# EAGLE board synth (EAGLE 6.3)
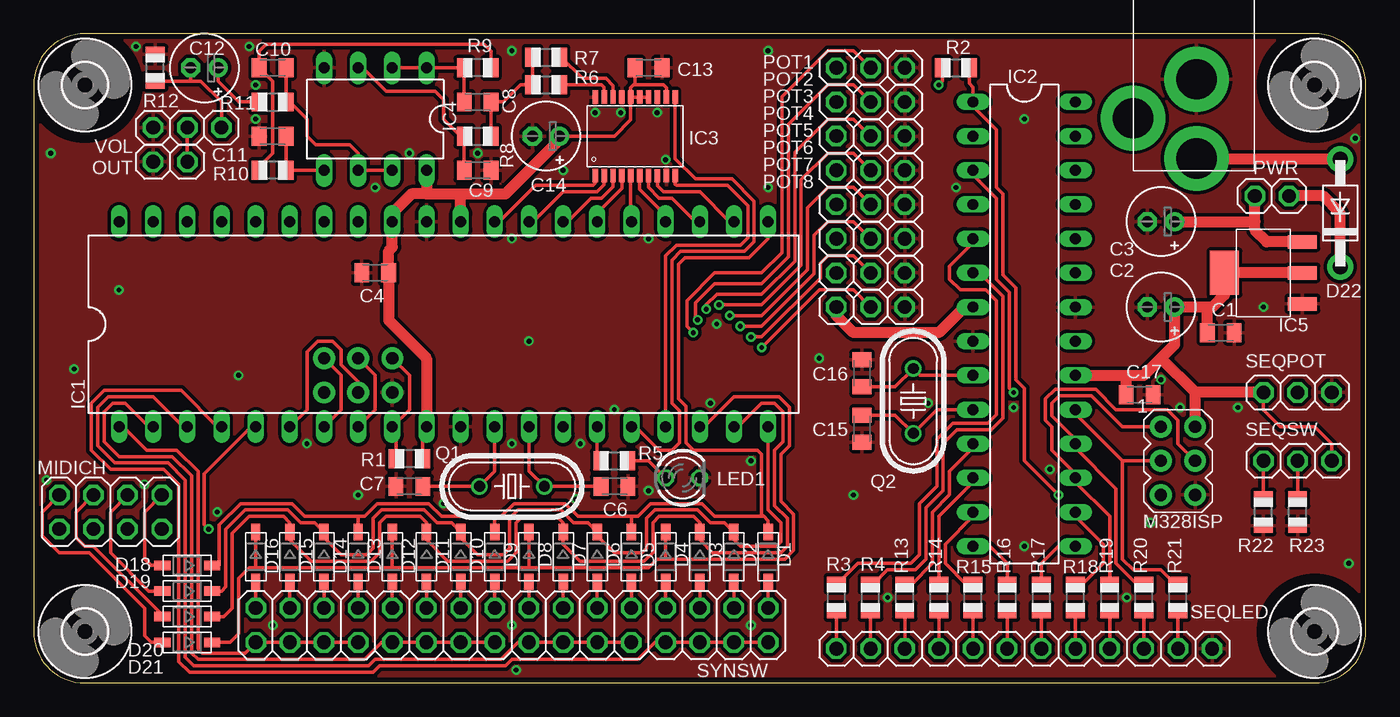
[diagram p0: board, top side]
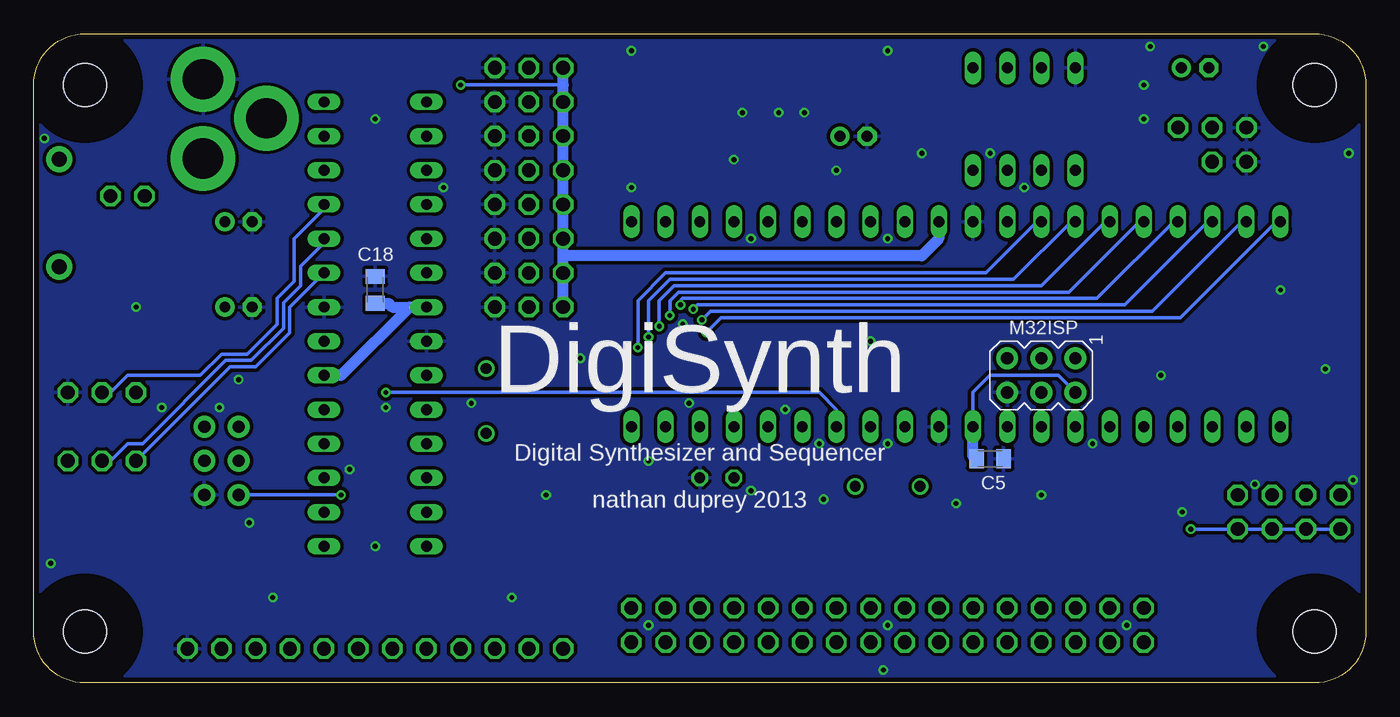
[diagram p1: board, bottom side, seen from below]

Size 99.06 x 48.26 mm. Coordinates in mm from the lower left corner, seen from the top.
Outline: 0,44.45 0,3.81 arc90 3.81,0 95.25,0 arc90 99.06,3.81 99.06,44.45 arc90 95.25,48.26 3.81,48.26 arc90 0,44.45
Copper layers (1*16): Top 0.0356mm / dielectric 1.5011mm / Bottom 0.0356mm
Design rules "LaenPCBOrder *": minimum track width 6mil, minimum drill 13mil, track to track 6mil, track to pad 6mil, pad to pad 6mil, via to via 6mil, smd to smd 6mil, copper to edge 15mil, drill to drill 6mil, minimum pad ring 7mil, minimum via ring 7mil, stop-mask expansion 4mil, vias tented up to drill 30mil, thermal gap 10mil

## Footprints (pad centres in the part's own frame; a part is rotated, then mirrored left to right if it is on the bottom)
C0805K = smd 1.1 x 1.4: 1 -1,0; 2 1,0
E2-5 = drill 0.813 pad 1.422: + -1.016,0 | drill 0.813 pad 1.422 octagon: - 1.016,0
SOD-123 = smd 1.2 x 0.7: A 1.85,0; C -1.85,0
DO41-7 = drill 1.118 pad 1.93: A 4,0; C -4,0
3,2 = hole 3.2: 0,0
DIL40 = drill 0.813 long: 1 -24.13,-7.62; 2 -21.59,-7.62; 3 -19.05,-7.62; 4 -16.51,-7.62; 5 -13.97,-7.62; 6 -11.43,-7.62; 7 -8.89,-7.62; 8 -6.35,-7.62; 9 -3.81,-7.62; 10 -1.27,-7.62; 11 1.27,-7.62; 12 3.81,-7.62; 13 6.35,-7.62; 14 8.89,-7.62; 15 11.43,-7.62; 16 13.97,-7.62; 17 16.51,-7.62; 18 19.05,-7.62; 19 21.59,-7.62; 20 24.13,-7.62; 21 24.13,7.62; 22 21.59,7.62; 23 19.05,7.62; 24 16.51,7.62; 25 13.97,7.62; 26 11.43,7.62; 27 8.89,7.62; 28 6.35,7.62; 29 3.81,7.62; 30 1.27,7.62; 31 -1.27,7.62; 32 -3.81,7.62; 33 -6.35,7.62; 34 -8.89,7.62; 35 -11.43,7.62; 36 -13.97,7.62; 37 -16.51,7.62; 38 -19.05,7.62; 39 -21.59,7.62; 40 -24.13,7.62
DIL28-3 = drill 0.813 long: 1 -16.51,-3.81; 2 -13.97,-3.81; 3 -11.43,-3.81; 4 -8.89,-3.81; 5 -6.35,-3.81; 6 -3.81,-3.81; 7 -1.27,-3.81; 8 1.27,-3.81; 9 3.81,-3.81; 10 6.35,-3.81; 11 8.89,-3.81; 12 11.43,-3.81; 13 13.97,-3.81; 14 16.51,-3.81; 15 16.51,3.81; 16 13.97,3.81; 17 11.43,3.81; 18 8.89,3.81; 19 6.35,3.81; 20 3.81,3.81; 21 1.27,3.81; 22 -1.27,3.81; 23 -3.81,3.81; 24 -6.35,3.81; 25 -8.89,3.81; 26 -11.43,3.81; 27 -13.97,3.81; 28 -16.51,3.81
TSSOP20 = smd 1 x 0.4: 1 -2.937,2.693; 2 -2.937,2.032; 3 -2.937,1.372; 4 -2.937,0.712; 5 -2.937,0.051; 6 -2.937,-0.609; 7 -2.937,-1.27; 8 -2.943,-1.93; 9 -2.937,-2.59; 10 -2.937,-3.251; 11 2.905,-3.251; 12 2.905,-2.59; 13 2.911,-1.93; 14 2.905,-1.27; 15 2.905,-0.609; 16 2.905,0.051; 17 2.905,0.712; 18 2.905,1.372; 19 2.905,2.032; 20 2.905,2.693
DIL08 = drill 0.813 long: 1 -3.81,-3.81; 2 -1.27,-3.81; 3 1.27,-3.81; 4 3.81,-3.81; 5 3.81,3.81; 6 1.27,3.81; 7 -1.27,3.81; 8 -3.81,3.81
SOT223-3 = smd 1 x 2.15: 1 -2.3,-2.9; 2 0,-2.9; 3 2.3,-2.9 | smd 3.25 x 2.15: 4 0,2.9
LED3MM = drill 0.813 octagon: A -1.27,0; K 1.27,0
AVRISP = drill 0.9 pad 1.626: 1 -1.27,2.54; 2 1.27,2.54; 3 -1.27,0; 4 1.27,0; 5 -1.27,-2.54; 6 1.27,-2.54
2X04 = drill 1.016 octagon: 1 -3.81,-1.27; 2 -3.81,1.27; 3 -1.27,-1.27; 4 -1.27,1.27; 5 1.27,-1.27; 6 1.27,1.27; 7 3.81,-1.27; 8 3.81,1.27
1X02 = drill 1.016 octagon: 1 -1.27,0; 2 1.27,0
PJ-102A = drill 3 pad 4.8: RING 0.1,-3.39; RING_SW -4.6,-6.29; TIP 0.1,-9.29
1X03 = drill 1.016 octagon: 1 -2.54,0; 2 0,0; 3 2.54,0
HC49U-V = drill 0.813: 1 -2.413,0; 2 2.413,0
R0805 = smd 1.1 x 1.4: 1 -1,0; 2 1,0
1X12 = drill 1.016 octagon: 1 -13.97,0; 2 -11.43,0; 3 -8.89,0; 4 -6.35,0; 5 -3.81,0; 6 -1.27,0; 7 1.27,0; 8 3.81,0; 9 6.35,0; 10 8.89,0; 11 11.43,0; 12 13.97,0
2X16 = drill 1.016 octagon: 1 -19.05,-1.27; 2 -19.05,1.27; 3 -16.51,-1.27; 4 -16.51,1.27; 5 -13.97,-1.27; 6 -13.97,1.27; 7 -11.43,-1.27; 8 -11.43,1.27; 9 -8.89,-1.27; 10 -8.89,1.27; 11 -6.35,-1.27; 12 -6.35,1.27; 13 -3.81,-1.27; 14 -3.81,1.27; 15 -1.27,-1.27; 16 -1.27,1.27; 17 1.27,-1.27; 18 1.27,1.27; 19 3.81,-1.27; 20 3.81,1.27; 21 6.35,-1.27; 22 6.35,1.27; 23 8.89,-1.27; 24 8.89,1.27; 25 11.43,-1.27; 26 11.43,1.27; 27 13.97,-1.27; 28 13.97,1.27; 29 16.51,-1.27; 30 16.51,1.27; 31 19.05,-1.27; 32 19.05,1.27

## Placement (x,y rotation side)
C1  0.1uF  [C0805K]  88.27,26.04 0 top
C2  10uF  [E2-5]  83.82,27.94 180 top
C3  0.33uF  [E2-5]  83.82,34.29 180 top
C4  0.1uF  [C0805K]  25.4,30.48 180 top
C5  0.1uF  [C0805K]  27.94,16.67 0 bottom
C6  22pF  [C0805K]  43.18,14.61 180 top
C7  22pF  [C0805K]  27.94,14.61 0 top
C8  0.01uF  [C0805K]  33.02,43.18 180 top
C9  470pF  [C0805K]  33.02,38.1 0 top
C10  0.001uF  [C0805K]  17.78,45.72 0 top
C11  470pF  [C0805K]  17.78,40.64 180 top
C12  4.7uF  [E2-5]  12.7,45.72 180 top
C13  0.1uF  [C0805K]  45.72,45.72 0 top
C14  10uF  [E2-5]  38.1,40.64 180 top
C15  22pF  [C0805K]  61.59,18.89 270 top
C16  22pF  [C0805K]  61.59,23.02 90 top
C17  0.1uF  [C0805K]  82.23,21.43 0 top
C18  0.1uF  [C0805K]  73.66,29.21 90 bottom
D1  1N4148  [SOD-123]  54.61,9.37 270 top
D2  1N4148  [SOD-123]  52.07,9.37 270 top
D3  1N4148  [SOD-123]  49.53,9.37 270 top
D4  1N4148  [SOD-123]  46.99,9.37 270 top
D5  1N4148  [SOD-123]  44.45,9.37 270 top
D6  1N4148  [SOD-123]  41.91,9.37 270 top
D7  1N4148  [SOD-123]  39.37,9.37 270 top
D8  1N4148  [SOD-123]  36.83,9.37 270 top
D9  1N4148  [SOD-123]  34.29,9.37 270 top
D10  1N4148  [SOD-123]  31.75,9.37 270 top
D11  1N4148  [SOD-123]  29.21,9.37 270 top
D12  1N4148  [SOD-123]  26.67,9.37 270 top
D13  1N4148  [SOD-123]  24.13,9.37 270 top
D14  1N4148  [SOD-123]  21.59,9.37 270 top
D15  1N4148  [SOD-123]  19.05,9.37 270 top
D16  1N4148  [SOD-123]  16.51,9.37 270 top
D18  1N4148  [SOD-123]  11.43,8.73 180 top
D19  1N4148  [SOD-123]  11.43,6.83 180 top
D20  1N4148  [SOD-123]  11.43,4.92 180 top
D21  1N4148  [SOD-123]  11.43,3.02 180 top
D22  1N4001  [DO41-7]  97.16,34.92 90 top
H1  MOUNT-HOLE3.2  [3,2]  95.25,44.45 0 top
H2  MOUNT-HOLE3.2  [3,2]  3.81,44.45 0 top
H3  MOUNT-HOLE3.2  [3,2]  3.81,3.81 0 top
H4  MOUNT-HOLE3.2  [3,2]  95.25,3.81 0 top
IC1  MEGA32-P  [DIL40]  30.48,26.67 0 top
IC2  ATMEGA168-20P  [DIL28-3]  73.66,26.67 270 top
IC3  AD7302SMD  [TSSOP20]  44.45,40.64 90 top
IC4  MCP6002  [DIL08]  25.4,41.91 180 top
IC5  AP1117E  [SOT223-3]  91.44,30.48 90 top
LED1  3MM  [LED3MM]  48.26,15.24 0 top
M32ISP  AVRISP-6  [AVRISP]  24.13,22.86 270 bottom
M328ISP  AVRISP-6  [AVRISP]  85.09,16.51 0 top
MIDICH  [2X04]  5.71,12.7 180 top
OUT  [1X02]  10.16,38.73 180 top
P1  2.1MMJACKTHM  [PJ-102A]  86.36,48.26 0 top
POT1  [1X03]  62.23,45.72 0 top
POT2  [1X03]  62.23,43.18 0 top
POT3  [1X03]  62.23,40.64 0 top
POT4  [1X03]  62.23,38.1 0 top
POT5  [1X03]  62.23,35.56 0 top
POT6  [1X03]  62.23,33.02 0 top
POT7  [1X03]  62.23,30.48 0 top
POT8  [1X03]  62.23,27.94 0 top
PWR  [1X02]  92.08,36.2 180 top
Q1  16 MHz  [HC49U-V]  35.56,14.61 0 top
Q2  [HC49U-V]  65.41,20.95 90 top
R1  10k  [R0805]  27.94,16.67 180 top
R2  10k  [R0805]  68.58,45.72 0 top
R3  220  [R0805]  59.69,6.35 90 top
R4  220  [R0805]  62.23,6.35 90 top
R5  220  [R0805]  43.18,16.51 0 top
R6  1K  [R0805]  38.1,44.45 0 top
R7  274K  [R0805]  38.1,46.51 0 top
R8  10.7K  [R0805]  33.02,40.64 0 top
R9  4.64K  [R0805]  33.02,45.72 180 top
R10  23.7K  [R0805]  17.78,38.1 180 top
R11  100  [R0805]  17.78,43.18 0 top
R12  1M  [R0805]  9.05,45.72 90 top
R13  220  [R0805]  64.77,6.35 90 top
R14  220  [R0805]  67.31,6.35 90 top
R15  220  [R0805]  69.85,6.35 90 top
R16  220  [R0805]  72.39,6.35 90 top
R17  220  [R0805]  74.93,6.35 90 top
R18  220  [R0805]  77.47,6.35 90 top
R19  220  [R0805]  80.01,6.35 90 top
R20  220  [R0805]  82.55,6.35 90 top
R21  220  [R0805]  85.09,6.35 90 top
R22  10k  [R0805]  91.44,12.7 90 top
R23  10k  [R0805]  93.98,12.7 90 top
SEQLED  [1X12]  73.66,2.54 0 top
SEQPOT  [1X03]  93.98,21.59 0 top
SEQSW  [1X03]  93.98,16.51 0 top
SYNSW  [2X16]  35.56,4.29 180 top
VOL  [1X03]  11.43,41.27 180 top

## Library data of the parts
C1-C18 D1-D16 D18-D22 IC2 P1 R1-R23 = adafruit
H1-H4 = holes
IC1 IC4 LED1 = meeblip
IC3 = SparkFun
IC5 = Diodes Inc
M32ISP M328ISP = icsp
MIDICH OUT POT1-POT8 PWR SEQLED SEQPOT SEQSW SYNSW VOL = pinhead
Q1 Q2 = crystal; OC_FARNELL: 1666969; OC_NEWARK: unknown

## Nets
GND: C1.2 C2.- C3.- C4.2 C5.2 C6.1 C7.1 C9.2 C11.2 C13.2 C14.- C15.2 C16.2 C17.2 C18.2 IC1.11 IC1.31 IC2.8 IC2.22 IC3.9 IC3.13 IC3.17 IC3.20 IC4.4 IC5.1 LED1.K M32ISP.6 M328ISP.6 OUT.2 P1.RING POT1.3 POT2.3 POT3.3 POT4.3 POT5.3 POT6.3 POT7.3 POT8.3 R12.2 R22.1 R23.1 SEQLED.12 SEQPOT.3 VOL.3
N$1: C7.2 IC1.12 Q1.1
N$2: C6.2 IC1.13 Q1.2
N$3: IC1.6 M32ISP.4
N$4: IC1.8 M32ISP.3
N$5: IC1.7 M32ISP.1
N$6: IC1.40 POT1.2
N$7: IC1.39 POT2.2
N$8: IC1.9 M32ISP.5 R1.2
N$9: IC1.38 POT3.2
N$10: IC1.37 POT4.2
N$11: IC1.15 R5.1
N$12: IC1.36 POT5.2
N$13: LED1.A R5.2
N$14: IC1.35 POT6.2
N$15: IC1.34 POT7.2
N$16: IC1.33 POT8.2
N$17: OUT.1 VOL.2
N$18: D1.A SYNSW.1
N$19: IC3.19 R6.2
N$20: IC2.5 R3.2
N$21: C12.+ R11.1
N$22: IC1.5 MIDICH.2 MIDICH.4 MIDICH.6 MIDICH.8
N$23: C12.- R12.1 VOL.1
N$24: D2.A SYNSW.3
N$25: D22.A P1.TIP
N$26: IC1.3 SYNSW.10 SYNSW.12 SYNSW.14 SYNSW.16
N$27: C3.+ IC5.3 PWR.2
N$28: D3.A SYNSW.5
N$29: D4.A SYNSW.7
N$30: C15.1 IC2.10 Q2.1
N$31: D5.A SYNSW.9
N$32: D6.A SYNSW.11
N$33: C16.1 IC2.9 Q2.2
N$34: IC1.22 IC3.8
N$35: IC1.23 IC3.7
N$36: IC1.24 IC3.6
N$37: IC1.25 IC3.5
N$38: IC1.26 IC3.4
N$39: IC1.27 IC3.3
N$40: IC1.28 IC3.2
N$41: IC1.29 IC3.1
N$42: D22.C PWR.1
N$43: IC1.17 IC3.10
N$44: D7.A SYNSW.13
N$45: R21.1 SEQLED.11
N$46: IC2.19 M328ISP.3 R21.2
N$47: IC1.14 IC2.3
N$48: IC1.16 IC3.11
N$49: D8.A SYNSW.15
N$50: IC2.18 M328ISP.1 R20.2
N$51: D9.A SYNSW.17
N$52: D10.A SYNSW.19
N$53: D11.A SYNSW.21
N$54: D12.A SYNSW.23
N$55: D13.A SYNSW.25
N$56: D14.A SYNSW.27
N$57: IC2.1 M328ISP.5 R2.2
N$58: R3.1 SEQLED.1
N$59: D18.A MIDICH.1
N$60: D15.A SYNSW.29
N$61: R4.1 SEQLED.2
N$62: D1.C D5.C D9.C D13.C D18.C IC1.21
N$63: D19.A MIDICH.3
N$64: D16.A SYNSW.31
N$65: D20.A MIDICH.5
N$66: D21.A MIDICH.7
N$67: R13.1 SEQLED.3
N$68: R14.1 SEQLED.4
N$69: C8.1 R6.1 R7.1 R8.2
N$70: IC3.18 R7.2
N$71: C9.1 IC4.3 R8.1
N$72: D4.C D8.C D12.C D16.C D21.C IC1.18
N$73: C10.1 R9.1 R10.2
N$74: C11.1 IC4.5 R10.1
N$75: C10.2 IC4.6 IC4.7 R11.2
N$76: R15.1 SEQLED.5
N$77: C8.2 IC4.1 IC4.2 R9.2
N$78: R16.1 SEQLED.6
N$79: R17.1 SEQLED.7
N$80: R18.1 SEQLED.8
N$81: R19.1 SEQLED.9
N$82: R20.1 SEQLED.10
N$83: IC2.6 R4.2
N$84: IC2.11 R13.2
N$85: IC2.12 R14.2
N$86: IC2.13 R15.2
N$87: IC2.14 R16.2
N$88: IC2.15 R17.2
N$89: IC2.16 R18.2
N$90: IC2.17 M328ISP.4 R19.2
N$91: IC2.25 SEQPOT.2
N$92: IC2.24 R23.2 SEQSW.2
N$93: IC2.23 R22.2 SEQSW.1
S1: IC1.1 SYNSW.26 SYNSW.28 SYNSW.30 SYNSW.32
S3: IC1.2 SYNSW.18 SYNSW.20 SYNSW.22 SYNSW.24
S7: D3.C D7.C D11.C D15.C D20.C IC1.19
S8: IC1.4 SYNSW.2 SYNSW.4 SYNSW.6 SYNSW.8
S10A: D2.C D6.C D10.C D14.C D19.C IC1.20
VCC: C1.1 C2.+ C4.1 C5.1 C13.1 C14.+ C17.1 C18.1 IC1.10 IC1.30 IC1.32 IC2.7 IC2.20 IC3.12 IC3.14 IC3.15 IC3.16 IC4.8 IC5.2 IC5.4 M32ISP.2 M328ISP.2 POT1.1 POT2.1 POT3.1 POT4.1 POT5.1 POT6.1 POT7.1 POT8.1 R1.1 R2.1 SEQPOT.1 SEQSW.3

## Tracks (layer width: path | path; a pad name or v marks a point on that pad's centre or on a via)
GND  (via drill 0.36)
  other vias: 46.35,42.39 46.99,38.89 43.66,42.39 41.75,42.39 39.37,38.1 33.02,39.37 16.51,41.91 7.62,47.31 16.03,47.31 16.51,44.45 27.94,39.37 13.65,12.7 24.13,13.97 20.32,17.78 30.48,13.34 35.56,17.78 45.72,14.29 53.34,16.51 40.64,17.78 0.95,15.08 8.26,14.76 17.78,4.29 35.56,4.29 53.34,4.29 35.88,0.95 83.82,22.54 85.25,20.48 73.66,10.16 63.5,6.35 81.28,6.35 72.87,20.48 75.56,15.88 73.66,41.91 68.58,36.83 91.44,27.94 89.53,20.48 97.79,8.89 98.27,40.48 54.61,46.99 35.56,46.99 54.61,36.83 45.72,33.02 35.56,33.02 43.18,20.32 15.24,22.86 6.35,29.21 1.27,39.37 25.4,36.83 36.83,25.4 50.32,20.8 50.8,26.67 60.96,13.97 58.42,24.13 66.52,20.8 83.03,11.91 3.02,23.34 40.32,13.65
  pour Bottom (isolate 0.254): 0,0 99.06,0 99.06,48.26 0,48.26
  pour Top (isolate 0.254): 0,0 99.06,0 99.06,48.26 0,48.26
N$1
  Top 0.254: C7.2 Q1.1 34.29,15.75 IC1.12
N$2
  Top 0.254: C6.2 Q1.2 36.83,15.75 IC1.13
N$3
  Top 0.254: M32ISP.4 24.13,22.38 22.86,23.65 22.86,24.77 22.23,25.4 21.11,25.4 20.32,24.61 20.32,20.32 IC1.6
N$4
  Top 0.254: IC1.8 25.4,20.32 25.4,22.86 M32ISP.3
N$5
  Top 0.254: IC1.7 22.86,20.32 22.86,22.86 M32ISP.1
N$6  (via drill 0.36)
  Top 0.254: POT1.2 60.96,46.99 59.05,46.99 55.64,43.58 55.64,31.99 54.13,30.48 50.64,30.48 48.58,28.42 48.58,26.51 v49.05,26.04
  Bottom 0.254: v49.05,26.04 47.94,27.15 13.81,27.15 6.67,34.29 IC1.40
N$7  (via drill 0.36)
  Top 0.254: POT2.2 60.96,44.45 59.05,44.45 56.12,41.51 56.12,31.67 54.13,29.69 50.64,29.69 49.21,28.26 49.21,27.15 v49.37,26.99
  Bottom 0.254: v49.37,26.99 48.74,27.62 15.88,27.62 9.21,34.29 IC1.39
N$8
  Top 0.254: R1.2 26.94,18.78 IC1.9 27.94,20.32 27.94,22.86 M32ISP.5
N$9  (via drill 0.36)
  Top 0.254: POT3.2 60.96,41.91 59.05,41.91 56.59,39.45 56.59,31.35 54.13,28.89 50.8,28.89 50.01,28.1 v50.01,27.78
  Bottom 0.254: v50.01,27.78 49.69,28.1 17.94,28.1 11.75,34.29 IC1.38
N$10  (via drill 0.36)
  Top 0.254: POT4.2 60.96,39.37 59.05,39.37 57.07,37.39 57.07,31.04 54.13,28.1 v50.96,28.1
  Bottom 0.254: v50.96,28.1 50.96,28.42 50.8,28.57 20,28.57 14.29,34.29 IC1.37
N$11
  Top 0.254: IC1.15 41.91,16.78 R5.1
N$12  (via drill 0.36)
  Top 0.254: POT5.2 60.96,36.83 59.05,36.83 57.55,35.32 57.55,30.72 54.13,27.3 v51.75,27.3
  Bottom 0.254: v51.75,27.3 51.75,28.42 51.12,29.05 22.07,29.05 16.83,34.29 IC1.36
N$13
  Top 0.254: R5.2 45.72,16.51 LED1.A
N$14  (via drill 0.36)
  Top 0.254: POT6.2 60.96,34.29 59.05,34.29 58.02,33.26 58.02,30.4 54.13,26.51 v52.55,26.51
  Bottom 0.254: v52.55,26.51 52.55,28.42 51.44,29.53 24.13,29.53 19.37,34.29 IC1.35
N$15  (via drill 0.36)
  Top 0.254: POT7.2 60.96,31.75 59.05,31.75 58.5,31.19 58.5,30.08 54.13,25.72 v53.34,25.72
  Bottom 0.254: v53.34,25.72 53.34,28.42 51.75,30 26.19,30 21.91,34.29 IC1.34
N$16  (via drill 0.36)
  Top 0.254: POT8.2 60.96,29.21 58.42,29.21 v54.13,24.92
  Bottom 0.254: v54.13,24.92 54.13,28.42 52.07,30.48 28.26,30.48 24.45,34.29 IC1.33
N$17
  Top 0.254: OUT.1 VOL.2
N$18
  Top 0.254: SYNSW.1 D1.A
N$19
  Top 0.254: IC3.19 42.42,44.26 42.23,44.45 R6.2
N$20
  Top 0.254: R3.2 59.74,7.35 61.28,8.89 65.25,8.89 65.88,9.53 65.88,13.34 67.15,14.61 67.15,18.1 68.34,19.29 70.96,19.29 71.6,19.92 71.6,28.42 70.8,29.21 68.9,29.21 68.1,30 68.1,30.96 69.85,32.7 IC2.5
N$21
  Top 0.254: R11.1 15.24,43.18 13.72,44.7 C12.+
N$22  (via drill 0.36)
  Top 0.254: v13.02,11.43 12.7,11.75 12.7,15.56 16.19,19.05 IC1.5
  Bottom 0.254: MIDICH.8 MIDICH.6 MIDICH.4 MIDICH.2 v13.02,11.43
N$23
  Top 0.254: R12.1 11.75,44.72 | 11.75,44.72 12.43,44.72 13.97,43.18 VOL.1 | C12.- 11.68,44.78 11.75,44.72
N$24
  Top 0.254: D2.A SYNSW.3
N$25
  Top 0.813: P1.TIP 97.11,38.97 D22.A
N$26
  Top 0.254: SYNSW.10 SYNSW.12 SYNSW.14 SYNSW.16 36.04,3.02 34.77,1.75 25.4,1.75 24.92,1.27 11.91,1.27 11.27,1.91 11.27,15.08 10,16.35 6.03,16.35 4.76,17.62 4.76,20.48 5.56,21.27 8.89,21.27 11.11,19.05 IC1.3
N$27
  Top 0.813: IC5.3 91.68,32.78 90.81,33.66 90.81,34.29 | 90.81,34.29 PWR.2 | C3.+ 90.81,34.29
N$28
  Top 0.254: SYNSW.5 D3.A
N$29
  Top 0.254: D4.A SYNSW.7
N$30
  Top 0.254: IC2.10 67.18,20.32 Q2.1 64.06,19.89 C15.1
N$31
  Top 0.254: SYNSW.9 D5.A
N$32
  Top 0.254: D6.A SYNSW.11
N$33
  Top 0.254: IC2.9 65.91,22.86 Q2.2 64.06,22.02 C16.1
N$34
  Top 0.254: IC3.8 46.38,36.96 46.83,36.51 49.53,36.51 51.75,34.29 IC1.22
N$35
  Top 0.254: IC3.7 45.72,36.83 46.51,36.04 47.47,36.04 49.21,34.29 IC1.23
N$36
  Top 0.254: IC3.6 45.06,36.7 46.99,34.77 IC1.24
N$37
  Top 0.254: IC3.5 44.4,34.34 IC1.25
N$38
  Top 0.254: IC3.4 43.74,36.75 41.91,34.92 IC1.26
N$39
  Top 0.254: IC3.3 43.08,36.89 42.23,36.04 41.43,36.04 39.69,34.29 IC1.27
N$40
  Top 0.254: IC3.2 42.42,37.02 41.91,36.51 39.37,36.51 37.15,34.29 IC1.28
N$41
  Top 0.254: IC3.1 41.76,37.15 41.59,36.99 37.31,36.99 34.61,34.29 IC1.29
N$42
  Top 0.813: D22.C 97.16,34.92 95.89,36.2 PWR.1
N$43
  Top 0.254: IC3.10 47.7,37.07 47.78,36.99 51.59,36.99 53.1,35.48 53.1,33.1 52.55,32.54 47.78,32.54 46.99,31.75 IC1.17
N$44
  Top 0.254: SYNSW.13 D7.A
N$45
  Top 0.254: R21.1 SEQLED.11
N$46
  Top 0.254: R21.2 84.88,7.35 83.82,8.41 81.76,8.41 80.96,9.21 80.96,16.51 | 80.96,16.51 77.47,20 IC2.19 | M328ISP.3 80.96,16.51
N$47  (via drill 0.36)
  Top 0.254: v72.87,21.59 72.55,21.91 72.55,29.05 71.6,30 71.6,36.04 69.85,37.78 IC2.3
  Bottom 0.254: IC1.14 39.37,20.32 40.64,21.59 v72.87,21.59
N$48
  Top 0.254: IC3.11 47.7,38.98 49.21,37.47 51.91,37.47 53.58,35.8 53.58,32.78 52.86,32.07 48.1,32.07 47.47,31.43 47.47,20.8 48.02,20.24 48.02,17.86 47.47,17.3 46.51,17.3 44.77,19.05 IC1.16
N$49
  Top 0.254: D8.A SYNSW.15
N$50
  Top 0.254: R20.2 82.03,7.35 80.49,8.89 80.49,14.45 77.47,17.46 IC2.18 77.47,18.1 75.72,19.84 75.72,20.8 76.28,21.35 78.66,21.35 80.96,19.05 M328ISP.1
N$51
  Top 0.254: SYNSW.17 D9.A
N$52
  Top 0.254: D10.A SYNSW.19
N$53
  Top 0.254: SYNSW.21 D11.A
N$54
  Top 0.254: D12.A SYNSW.23
N$55
  Top 0.254: SYNSW.25 D13.A
N$56
  Top 0.254: D14.A SYNSW.27
N$57  (via drill 0.36)
  Top 0.254: R2.2 69.58,44.56 69.85,44.29 IC2.1 69.85,42.86 71.6,41.12 71.6,36.83 72.07,36.35 72.07,30.32 73.03,29.37 73.03,22.54 73.66,21.91 73.66,16.51 v76.2,13.97
  Bottom 0.254: v76.2,13.97 M328ISP.5
N$58
  Top 0.254: SEQLED.1 R3.1
N$59
  Top 0.254: D18.A 8.73,8.73 8.26,9.21 8.26,12.7 MIDICH.1
N$60
  Top 0.254: D15.A SYNSW.29
N$61
  Top 0.254: SEQLED.2 R4.1
N$62
  Top 0.254: D13.C 24.13,12.38 | 34.29,12.38 30.32,12.38 29.37,13.34 25.56,13.34 24.61,12.38 24.13,12.38 | 34.29,12.38 34.77,12.38 35.72,13.34 39.53,13.34 40.48,12.38 44.45,12.38 | 44.45,12.38 44.93,12.38 45.88,13.34 49.69,13.34 50.64,12.38 54.29,12.38 | D9.C 34.29,12.38 | D5.C 44.45,12.38 | D18.C 13.81,8.73 13.81,11.75 15.4,13.34 19.21,13.34 20.16,12.38 24.13,12.38 | IC1.21 54.61,33.02 53.18,31.59 48.42,31.59 47.94,31.11 47.94,21.11 48.5,20.56 48.5,17.86 49.05,17.3 53.82,17.3 54.13,16.99 54.13,12.54 54.29,12.38 | 54.29,12.38 54.61,12.06 D1.C
N$63
  Top 0.254: D19.A 8.57,6.83 5.71,9.68 5.71,12.7 MIDICH.3
N$64
  Top 0.254: D16.A SYNSW.31
N$65
  Top 0.254: D20.A 9.58,5.03 4.45,10.16 3.81,10.16 3.17,10.79 3.17,12.7 MIDICH.5
N$66
  Top 0.254: D21.A 8.73,3.02 8.26,3.49 8.26,5.56 4.13,9.68 1.91,9.68 0.64,10.95 0.64,12.7 MIDICH.7
N$67
  Top 0.254: R13.1 SEQLED.3
N$68
  Top 0.254: SEQLED.4 R14.1
N$69
  Top 0.254: R7.1 R6.1 36.2,44.45 34.92,43.18 C8.1 R8.2
N$70
  Top 0.254: IC3.18 43.08,44.39 42.55,44.93 40.8,44.93 39.21,46.51 R7.2
N$71
  Top 0.254: C9.1 R8.1 31.75,40.64 30.48,41.91 30.48,43.34 29.84,43.97 26.19,43.97 24.45,45.72 IC4.3
N$72
  Top 0.254: D16.C 16.51,8.57 | 16.51,8.57 16.03,8.57 15.24,7.78 15.24,3.65 14.61,3.02 D21.C | 16.51,8.57 26.67,8.57 | 26.67,8.57 36.83,8.57 | 36.83,8.57 45.72,8.57 46.35,9.21 46.99,9.21 | 46.99,9.21 D4.C | D8.C 36.83,8.57 | D12.C 26.67,8.57 | IC1.18 49.85,19.05 52.07,21.27 55.4,21.27 56.2,20.48 56.2,17.62 55.56,16.99 55.56,13.49 56.52,12.54 56.52,9.84 55.88,9.21 46.99,9.21
N$73
  Top 0.254: R10.2 16.78,38.37 17.78,39.37 17.78,44.72 C10.1 16.78,46.94 17.3,47.47 33.5,47.47 34.02,46.94 R9.1
N$74
  Top 0.254: C11.1 R10.1 IC4.5
N$75
  Top 0.254: IC4.7 IC4.6 24.13,39.37 23.5,40.01 20.95,40.01 20.32,40.64 20.32,41.91 19.05,43.18 R11.2 C10.2
N$76
  Top 0.254: R15.1 SEQLED.5
N$77
  Top 0.254: IC4.2 IC4.1 R9.2 C8.2
N$78
  Top 0.254: SEQLED.6 R16.1
N$79
  Top 0.254: R17.1 SEQLED.7
N$80
  Top 0.254: SEQLED.8 R18.1
N$81
  Top 0.254: R19.1 SEQLED.9
N$82
  Top 0.254: SEQLED.10 R20.1
N$83
  Top 0.254: R4.2 62.44,7.35 63.5,8.41 65.56,8.41 66.36,9.21 66.36,13.02 67.63,14.29 67.63,17.78 68.66,18.81 71.2,18.81 72.07,19.68 72.07,28.73 70.33,30.48 IC2.6
N$84
  Top 0.254: R13.2 65.29,7.35 66.83,8.89 66.83,12.7 68.1,13.97 68.1,15.72 69.85,17.46 IC2.11
N$85
  Top 0.254: R14.2 67.31,12.38 69.85,14.92 IC2.12
N$86
  Top 0.254: IC2.13 69.85,12.38 67.79,10.32 67.79,8.89 69.33,7.35 R15.2
N$87
  Top 0.254: IC2.14 71.12,10.16 72.39,8.89 R16.2
N$88
  Top 0.254: IC2.15 76.2,10.16 74.93,8.89 R17.2
N$89
  Top 0.254: R18.2 77.99,7.35 79.53,8.89 79.53,10.32 77.47,12.38 IC2.16
N$90
  Top 0.254: R19.2 80.01,12.38 77.47,14.92 IC2.17 77.47,15.56 75.72,17.3 75.72,19.05 75.25,19.53 75.25,21.11 75.96,21.83 78.98,21.83 80.49,20.32 84.3,20.32 85.09,19.53 85.09,17.78 M328ISP.4
N$91
  Bottom 0.254: SEQPOT.2 93.34,21.59 92.08,22.86 86.68,22.86 85.09,24.45 83.19,24.45 80.96,26.67 80.96,28.57 79.69,29.84 79.69,33.02 77.47,35.24 IC2.25
N$92
  Top 0.254: R23.2 SEQSW.2
  Bottom 0.254: SEQSW.2 93.34,16.51 92.08,17.78 90.96,17.78 84.77,23.97 82.87,23.97 80.49,26.35 80.49,28.26 79.22,29.53 79.22,30.96 77.47,32.7 IC2.24
N$93
  Top 0.254: R22.2 SEQSW.1
  Bottom 0.254: IC2.23 80.01,27.94 80.01,26.04 82.55,23.5 84.45,23.5 SEQSW.1
S1
  Top 0.254: SYNSW.26 SYNSW.28 SYNSW.30 SYNSW.32 15.72,2.22 12.54,2.22 12.22,2.54 12.22,15.72 10.64,17.3 8.41,17.3 6.67,19.05 IC1.1
S3
  Top 0.254: SYNSW.18 SYNSW.20 SYNSW.22 SYNSW.24 25.88,3.02 24.61,1.75 12.22,1.75 11.75,2.22 11.75,15.4 10.32,16.83 6.35,16.83 5.24,17.94 5.24,20.16 5.87,20.8 6.83,20.8 8.57,19.05 IC1.2
S7
  Top 0.254: D20.C 14.13,4.92 14.76,5.56 14.76,11.11 16.03,12.38 18.57,12.38 19.05,11.91 D15.C 19.05,10.64 20.64,9.05 25.08,9.05 25.72,9.68 25.72,11.91 26.19,12.38 28.73,12.38 29.21,11.91 D11.C 29.21,10.64 30.8,9.05 35.24,9.05 35.88,9.68 35.88,11.91 36.35,12.38 38.89,12.38 39.37,11.91 D7.C 39.37,10.32 40.64,9.05 45.4,9.05 46.04,9.68 46.04,11.91 46.51,12.38 49.05,12.38 49.53,11.91 D3.C 49.53,10.64 50.48,9.68 55.56,9.68 56.04,10.16 56.04,12.22 55.09,13.18 55.09,17.3 55.72,17.94 55.72,20.16 55.09,20.8 54.13,20.8 52.39,19.05 IC1.19
S8
  Top 0.254: SYNSW.2 SYNSW.4 SYNSW.6 SYNSW.8 46.2,3.02 44.93,1.75 35.56,1.75 35.08,1.27 25.72,1.27 25.24,0.79 11.59,0.79 10.79,1.59 10.79,14.76 9.68,15.88 5.71,15.88 4.29,17.3 4.29,20.8 5.24,21.75 10.95,21.75 13.65,19.05 IC1.4
S10A
  Top 0.254: D19.C 13.97,6.83 14.29,7.14 14.29,11.43 15.72,12.86 18.89,12.86 19.84,11.91 20.9,11.91 D14.C 21.59,10.79 22.86,9.53 24.77,9.53 25.24,10 25.24,12.22 25.88,12.86 29.05,12.86 30,11.91 31.06,11.91 D10.C 31.75,10.79 33.02,9.53 34.92,9.53 35.4,10 35.4,12.22 36.04,12.86 39.21,12.86 40.16,11.91 41.22,11.91 D6.C 41.91,10.95 43.18,9.68 45.24,9.68 45.56,10 45.56,12.22 46.2,12.86 49.37,12.86 50.32,11.91 51.38,11.91 D2.C 52.07,10.64 52.55,10.16 55.24,10.16 55.56,10.48 55.56,11.91 54.61,12.86 IC1.20
VCC  (via drill 0.36)
  Top 0.254: IC3.16 IC3.15 IC3.14 | C14.+ 43.18,40.64 44.4,41.86 IC3.16 | C5.1 28.94,18.78 IC1.10 | R2.1 67.58,44.72 v67.31,44.45 | SEQSW.3 96.52,17.78 95.25,19.05 92.71,19.05 91.44,20.32 SEQPOT.1 | IC3.12 47.04,44.24 46.83,44.45 44.61,44.45 | 44.61,44.45 44.53,44.37 44.4,44.24 IC3.16 | C13.1 44.72,44.56 44.61,44.45
  Top 0.813: IC5.2 IC5.4 88.54,28.85 87.63,27.94 87,27.94 | 87,27.94 C2.+ 84.84,25.15 83.82,24.13 | C1.1 87.27,27.67 87,27.94 | 29.21,36.35 28.1,36.35 26.67,34.92 IC1.32 26.67,32.38 26.4,32.12 C4.1 26.4,26.94 29.21,24.13 IC1.10 | IC4.8 29.21,36.35 | 29.21,36.35 31.75,36.35 | 31.75,36.35 35.08,36.35 39.12,40.39 C14.+ | IC1.30 31.75,36.35 | IC2.20 81.28,22.86 | 81.28,22.86 82.55,22.86 83.82,24.13 | C17.1 81.23,22.81 81.28,22.86 | IC2.7 69.22,27.94 67.31,26.04 60.96,26.04 59.69,27.3 POT8.1 | SEQPOT.1 86.36,21.59 | 86.36,21.59 83.82,24.13 | M328ISP.2 86.36,21.59
  Bottom 0.254: 59.69,44.45 v67.31,44.45 | M32ISP.2 22.86,22.86 27.94,22.86 29.21,21.59 IC1.10
  Bottom 0.813: IC2.20 76.2,22.86 71.12,27.94 IC2.7 72.39,27.94 72.66,28.21 C18.1 | POT8.1 POT7.1 59.69,31.75 | 59.69,31.75 POT6.1 POT5.1 POT4.1 POT3.1 POT2.1 59.69,44.45 POT1.1 | IC1.30 31.75,33.02 33.02,31.75 59.69,31.75 | C5.1 29.05,16.67 29.21,16.83 IC1.10

## Text on the board
bPlace: DigiSynth | Digital Synthesizer and Sequencer | nathan duprey 2013